# EAGLE board sound_gps (EAGLE 7.7.0)
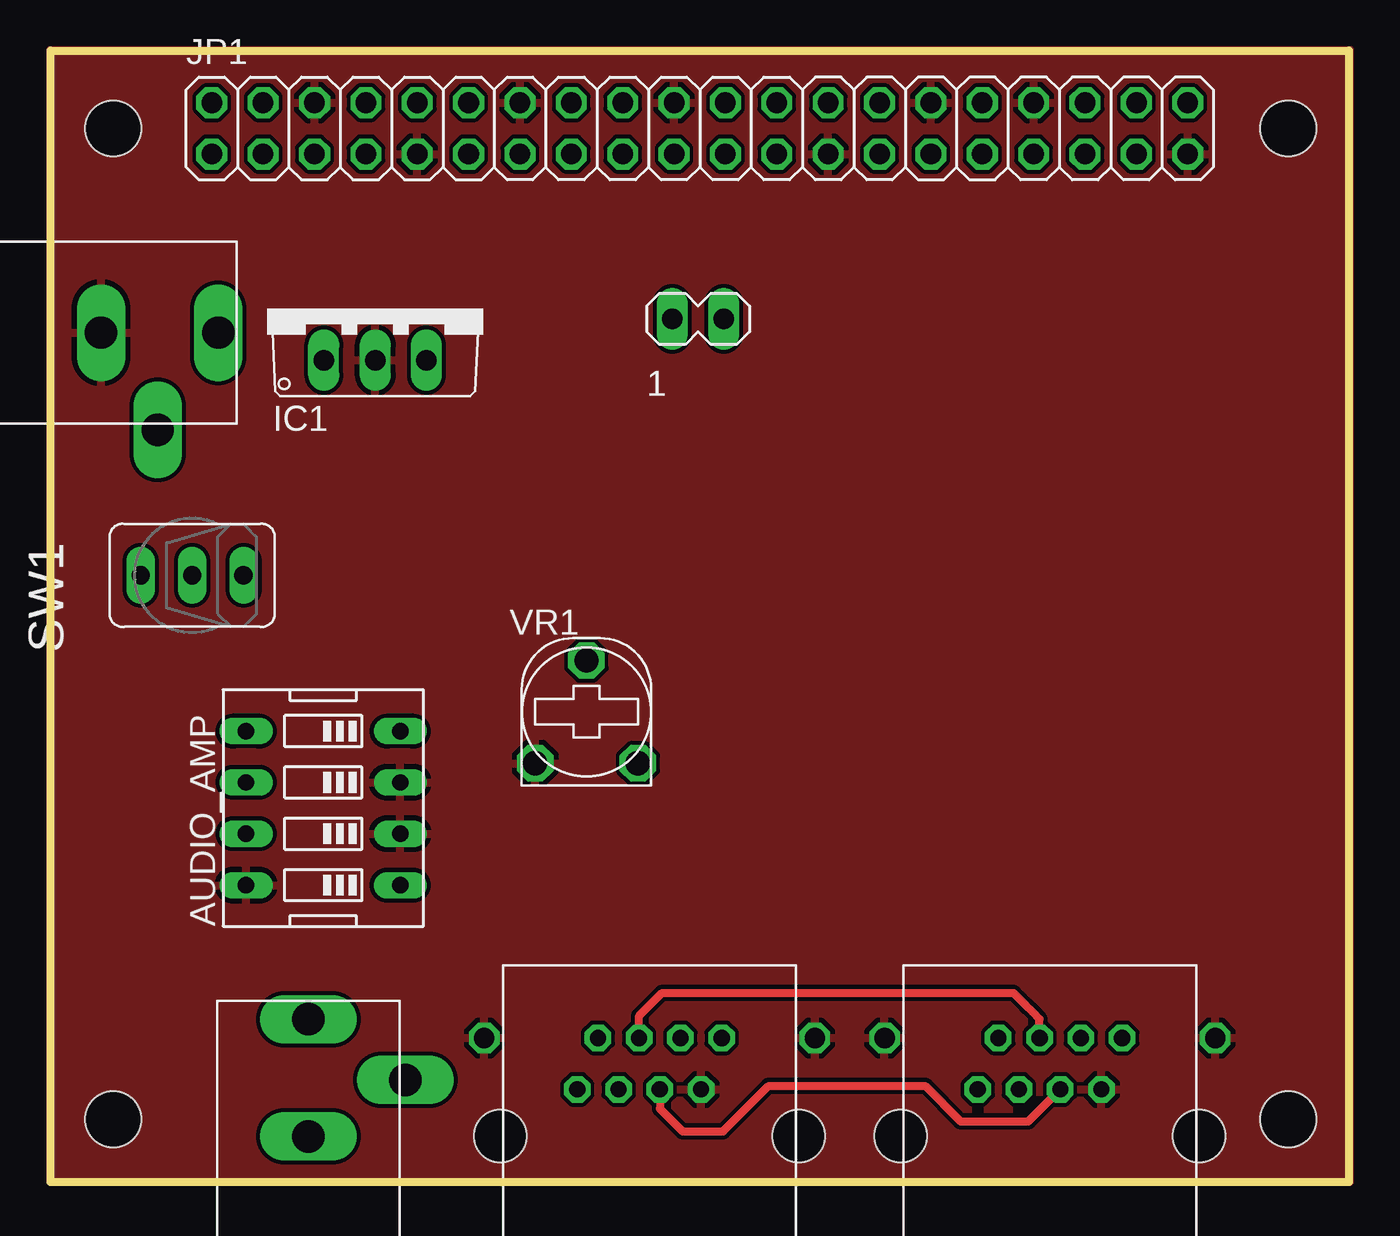
[diagram p0: board, top side]
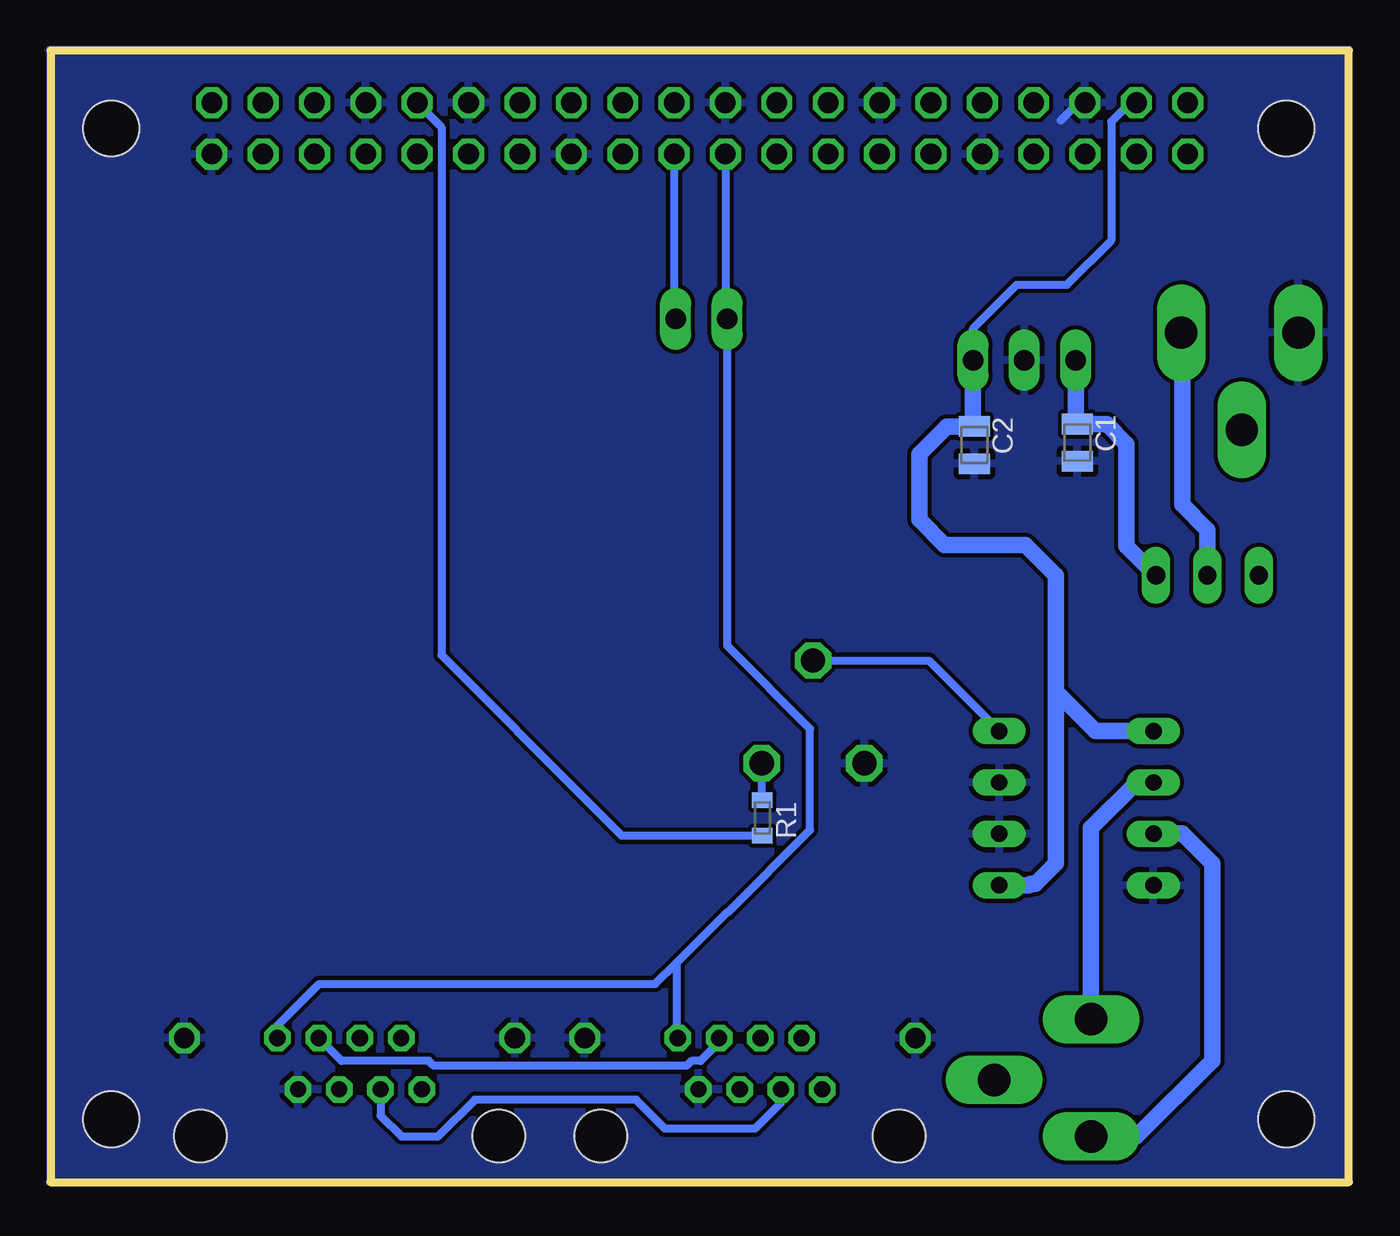
[diagram p1: board, bottom side, seen from below]

Size 64.2 x 55.95 mm. Coordinates in mm from the lower left corner, seen from the top.
Outline: 0,55.95 64.2,55.95 64.2,0 0,0 0,55.95
Copper layers (1*16): Top 0.0356mm / dielectric 1.5011mm / Bottom 0.0356mm
Design rules "formitaminimum": minimum track width 5mil, minimum drill 0.5994mm, track to track 0.2007mm, track to pad 0.2007mm, pad to pad 0.2007mm, via to via 0.2007mm, smd to smd 0mil, copper to edge 0mil, drill to drill 1mil, minimum pad ring 10mil, minimum via ring 8mil, stop-mask expansion 4mil, vias tented up to drill 0mil, thermal gap 10mil
Holes 2.75 mm at 3.1,52.1 3.1,3.1 61.2,52.1 61.2,3.1

## Footprints (pad centres in the part's own frame; a part is rotated, then mirrored left to right if it is on the bottom)
EDG-04 = drill 0.813 long: 1 -3.81,-3.81; 2 -1.27,-3.81; 3 1.27,-3.81; 4 3.81,-3.81; 5 3.81,3.81; 6 1.27,3.81; 7 -1.27,3.81; 8 -3.81,3.81
2012-C = smd 1.016 x 1.524: 1 -0.921,0; 2 0.921,0
MA02-1 = drill 1.016 long: 1 -1.27,0; 2 1.27,0
TO220V = drill 1.016 long: 1 -2.54,-2.54; 2 0,-2.54; 3 2.54,-2.54
2X20 = drill 1.016 octagon: 1 -24.13,-1.27; 2 -24.13,1.27; 3 -21.59,-1.27; 4 -21.59,1.27; 5 -19.05,-1.27; 6 -19.05,1.27; 7 -16.51,-1.27; 8 -16.51,1.27; 9 -13.97,-1.27; 10 -13.97,1.27; 11 -11.43,-1.27; 12 -11.43,1.27; 13 -8.89,-1.27; 14 -8.89,1.27; 15 -6.35,-1.27; 16 -6.35,1.27; 17 -3.81,-1.27; 18 -3.81,1.27; 19 -1.27,-1.27; 20 -1.27,1.27; 21 1.27,-1.27; 22 1.27,1.27; 23 3.81,-1.27; 24 3.81,1.27; 25 6.35,-1.27; 26 6.35,1.27; 27 8.89,-1.27; 28 8.89,1.27; 29 11.43,-1.27; 30 11.43,1.27; 31 13.97,-1.27; 32 13.97,1.27; 33 16.51,-1.27; 34 16.51,1.27; 35 19.05,-1.27; 36 19.05,1.27; 37 21.59,-1.27; 38 21.59,1.27; 39 24.13,-1.27; 40 24.13,1.27
18742 = drill 1.6 long: P$1 5.8,0; P$2 0,0; P$3 2.8,-4.8
1608 = smd 0.762 x 1.016: 1 -0.875,0; 2 0.875,0
TOGGLESW_SLIM = drill 0.9 long: 1 0,2.54; 2 0,0; 3 0,-2.54
AKI-RJ45-CAN = drill 0.8 octagon: CANH 3.695,2.54; CANL 2.675,0; GND-1 -0.385,2.54; GND-2 -1.405,0; RESERVED-1 -2.425,2.54; RESERVED-2 -3.445,0; VCC-1 1.655,2.54; VCC-2 0.635,0 | drill 1 octagon: SHIELD1 -8.05,2.54; SHIELD2 8.3,2.54 | hole 2.6: 7.5,-2.3; -7.25,-2.3
VR-637A = drill 1.2 octagon: 1 -2.54,-2.54; 2 2.54,-2.54; BR 0,2.54

## Placement (x,y rotation side)
AUDIO_AMP  [EDG-04]  13.48,18.49 90 top
C1  0.33u  [2012-C]  13.43,36.56 270 bottom
C2  0.1u  [2012-C]  18.52,36.44 270 bottom
CON1  MA02-1  [MA02-1]  32.02,42.68 0 top
IC1  7805TV  [TO220V]  16.05,43.18 0 top
JP1  [2X20]  32.1,52.1 0 top
POWER  DCJACK-NEW-18742  [18742]  2.5,42 0 top
R1  10k  [1608]  29,18 270 bottom
SPEAKER  DCJACK-NEW-18742  [18742]  12.75,2.25 90 top
SW1  TOGGLESW_SLIM  [TOGGLESW_SLIM]  7,30 90 top
SYNC0  AKI-RJ45-CAN  [AKI-RJ45-CAN]  29.49,4.58 0 top
SYNC1  AKI-RJ45-CAN  [AKI-RJ45-CAN]  49.29,4.58 0 top
VR1  20k  [VR-637A]  26.5,23.25 0 top

## Library data of the parts
AUDIO_AMP = special
C1 C2 R1 SW1 VR1 = Passive_Robotech
CON1 POWER SPEAKER SYNC0 SYNC1 = Connector_Robotech
IC1 = linear
JP1 = pinhead

## Nets
+5V: AUDIO_AMP.1 AUDIO_AMP.5 C2.1 IC1.3 JP1.4
+12V: POWER.P$1 SW1.2
AUDIO_IN: JP1.32 R1.2
AUDIO_NOUT: AUDIO_AMP.7 SPEAKER.P$2
AUDIO_POUT: AUDIO_AMP.6 SPEAKER.P$1
GND: AUDIO_AMP.2 AUDIO_AMP.3 AUDIO_AMP.8 C1.2 C2.2 IC1.2 JP1.6 JP1.9 JP1.14 JP1.20 JP1.25 JP1.30 JP1.34 JP1.39 POWER.P$2 SYNC0.CANL SYNC0.SHIELD1 SYNC0.SHIELD2 SYNC1.CANL SYNC1.SHIELD1 SYNC1.SHIELD2 VR1.1
GND-1: SYNC0.GND-1 SYNC1.GND-1
GND-2: SYNC0.GND-2 SYNC1.GND-2
N$1: AUDIO_AMP.4 VR1.BR
N$2: R1.1 VR1.2
N$3: C1.1 IC1.1 SW1.3
SYNC_CLK: CON1.1 JP1.19 SYNC0.CANH SYNC1.CANH
SYNC_CLK_GEN: CON1.2 JP1.21
VCC-1: SYNC0.VCC-1 SYNC1.VCC-1
VCC-2: SYNC0.VCC-2 SYNC1.VCC-2

## Tracks (layer width: path | path; a pad name or v marks a point on that pad's centre or on a via)
+5V
  Bottom 0.406: JP1.4 10.82,53.37 11.75,52.44 11.75,46.56 13.94,44.37 16.42,44.37 18.59,42.2 IC1.3
  Bottom 0.813: IC1.3 18.59,37.43 C2.1 19.89,37.36 21.25,36 21.25,32.75 20,31.5 16,31.5 14.5,30 14.5,24.25 | 14.5,24.25 14.5,15.75 15.5,14.75 15.75,14.75 15.82,14.68 AUDIO_AMP.1 | AUDIO_AMP.5 12.55,22.3 14.5,24.25
+12V
  Bottom 0.813: SW1.2 7,32.25 8.25,33.5 8.25,42 POWER.P$1
AUDIO_IN
  Bottom 0.406: JP1.32 44.87,52.16 44.87,26.05 37.45,18.64 36.02,17.2 35.95,17.12 R1.2
AUDIO_NOUT
  Bottom 0.813: AUDIO_AMP.7 9.64,17.25 8.25,17.25 6.75,15.75 6.75,6 10.5,2.25 SPEAKER.P$2
AUDIO_POUT
  Bottom 0.813: AUDIO_AMP.6 10.49,19.76 12.75,17.5 SPEAKER.P$1
GND
  Bottom 0.406: JP1.6 13.38,53.37 14.25,52.5
  Bottom 0.8: 13.05,35.52 C1.2
  pour Bottom: 0,56 64.25,56 64.25,0 0,0
  pour Top: 0,56 64.25,56 64.25,0 0,0
GND-1
  Top 0.406: SYNC0.GND-1 29.11,8.21 30.24,9.35 47.62,9.35 48.2,8.77 48.56,8.41 48.91,8.06 SYNC1.GND-1
GND-2
  Bottom 0.406: SYNC0.GND-2 28.09,3.92 29.36,2.64 33.82,2.64 35.25,4.07 43.22,4.07 45.04,2.25 46.85,2.25 47.88,3.29 SYNC1.GND-2
N$1
  Bottom 0.406: VR1.BR 20.78,25.79 AUDIO_AMP.4
N$2
  Bottom 0.406: VR1.2 29.04,18.91 R1.1
N$3
  Bottom 0.813: IC1.1 13.51,37.56 C1.1 11.98,37.48 11,36.5 11,31.46 SW1.3
SYNC_CLK
  Bottom 0.406: JP1.19 30.83,42.76 CON1.1 30.75,26.52 26.64,22.41 26.64,17.4 30.7,13.34 30.75,13.34 33.26,10.83 | 33.26,10.83 33.26,7.2 SYNC0.CANH | SYNC1.CANH 52.98,7.74 50.93,9.79 34.3,9.79 33.26,10.83
SYNC_CLK_GEN
  Bottom 0.406: JP1.21 33.37,42.76 CON1.2
VCC-1
  Bottom 0.406: SYNC0.VCC-1 31.14,6.91 32.06,5.99 32.51,5.99 32.75,5.75 45.25,5.75 45.5,6 49.8,6 49.81,5.99 SYNC1.VCC-1
VCC-2
  Top 0.406: SYNC0.VCC-2 30.12,3.62 31.25,2.5 33.25,2.5 35.5,4.75 43.25,4.75 45,3 48.34,3 SYNC1.VCC-2